# Altium PCB rf transmitter.PcbDoc
Units mm, origin at the board's own origin, x right, y up, seen from the top; angles counter-clockwise.
Board outline 67.44 x 37.08 mm, 2 copper layers (Top Layer, Bottom Layer); 15 components, 16 nets, 53 pads, 0 vias.
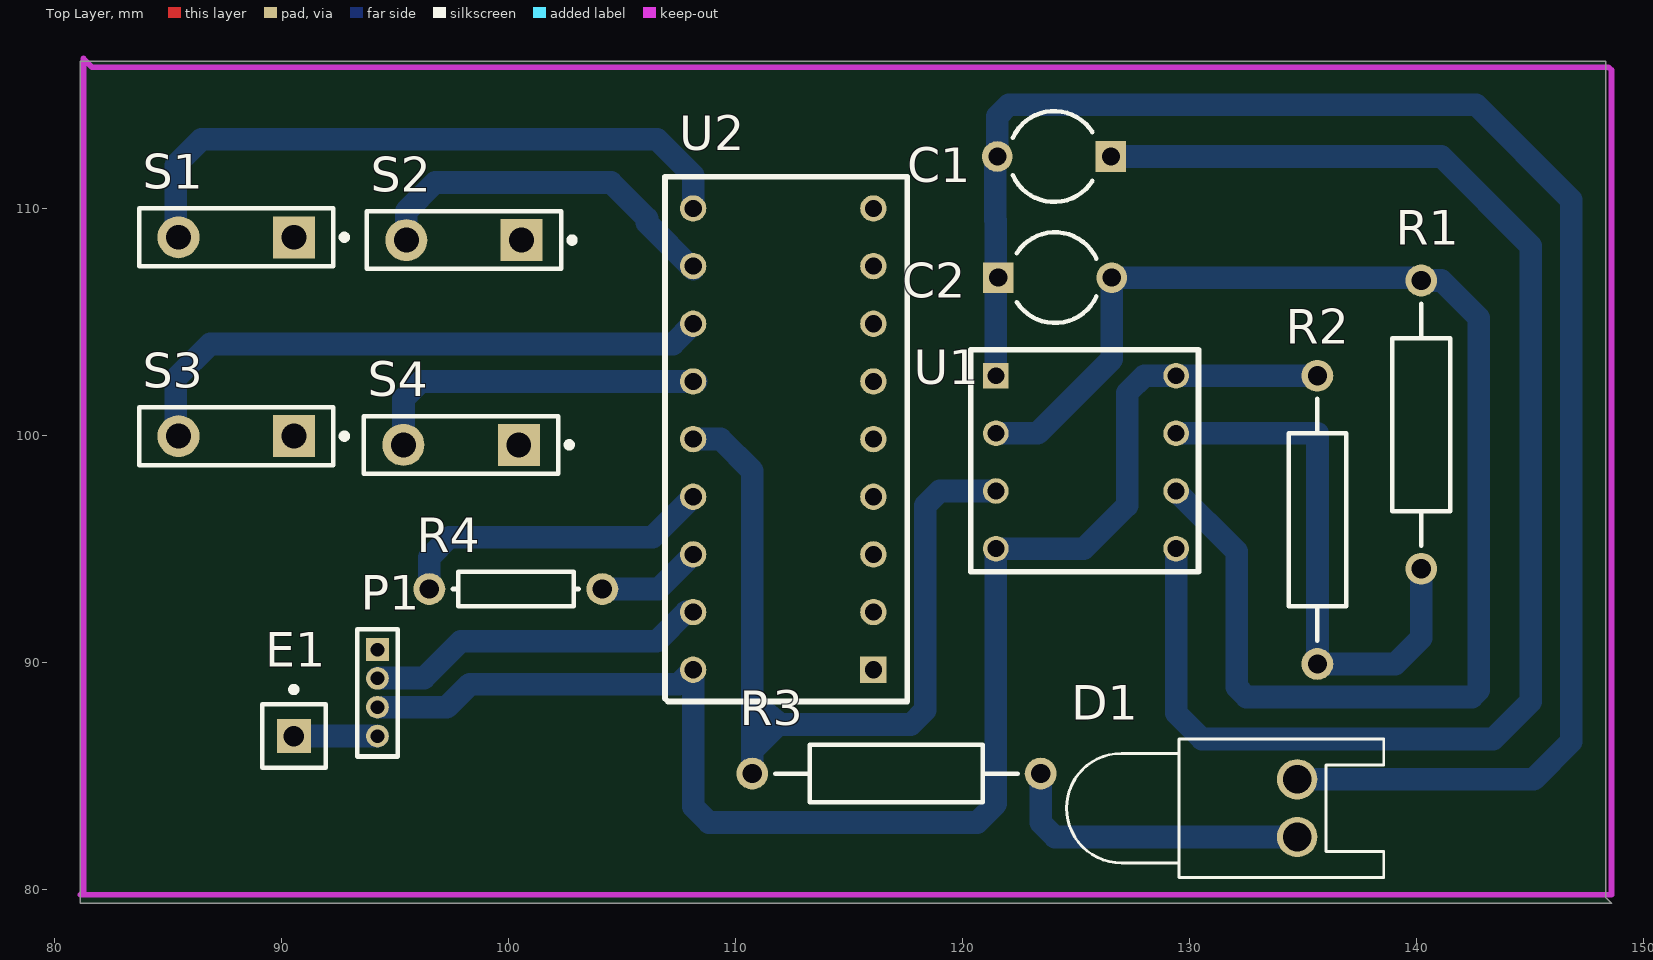
[diagram p0: Top Layer view]
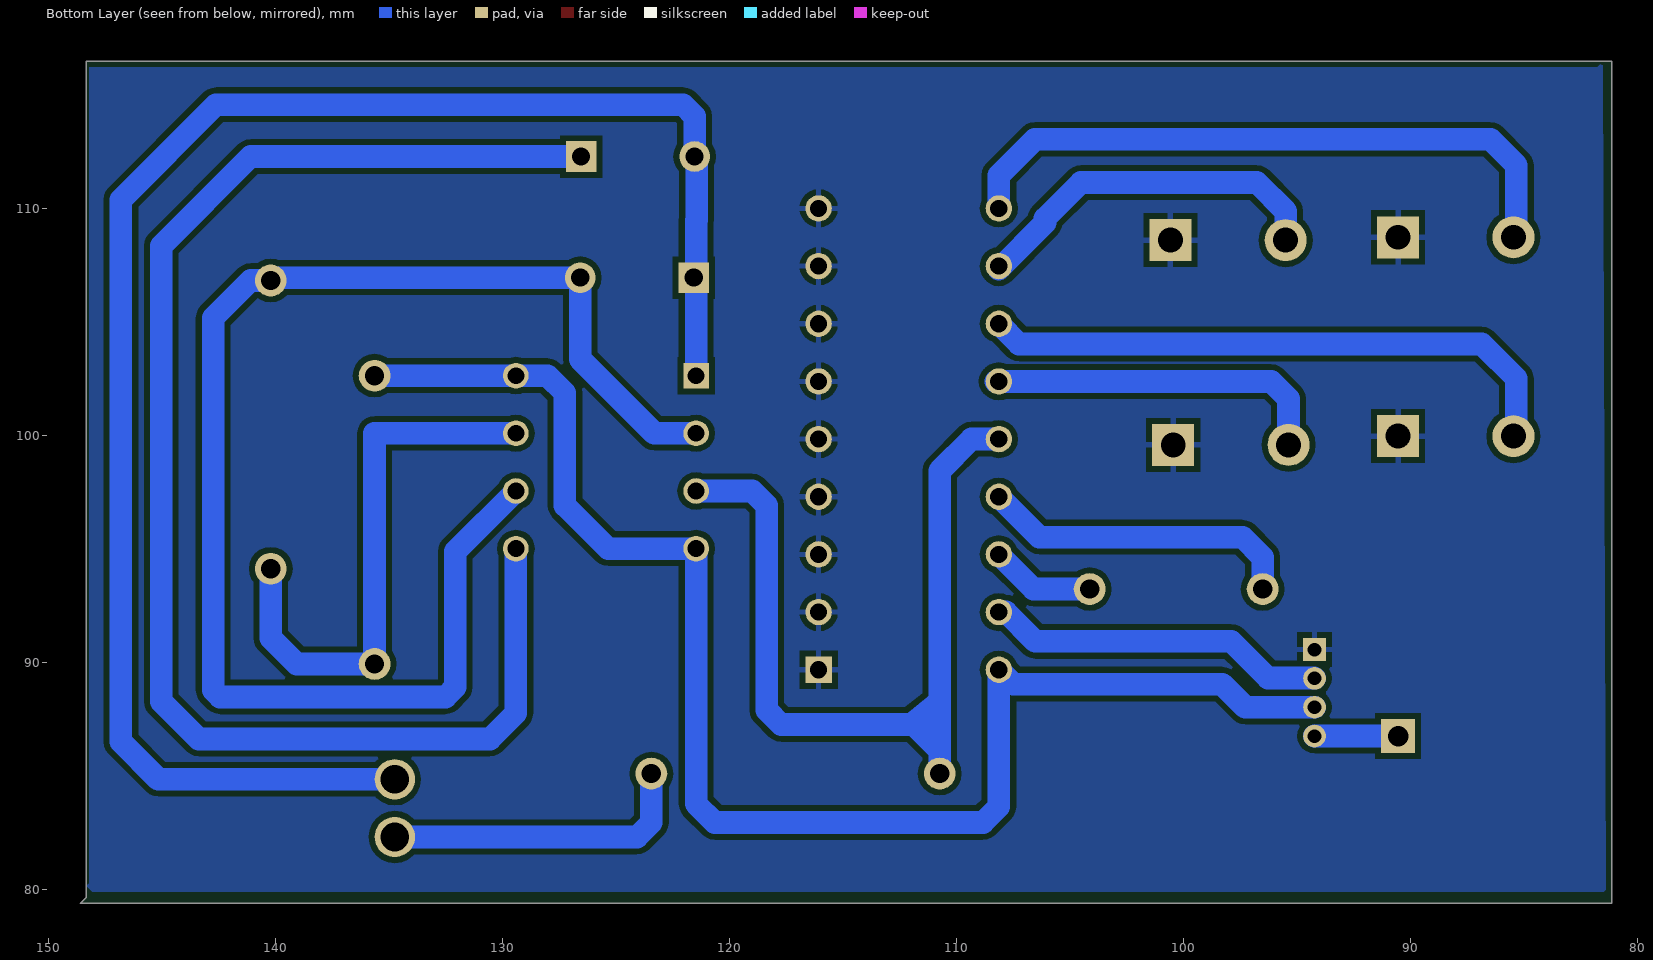
[diagram p1: Bottom Layer view, seen from below]

## Layer stack, top to bottom
Top Solder: solder mask 0.0102, Solder Resist, Dk 3.5
Top Layer: signal copper 0.0356
Dielectric 1: dielectric 0.32, FR-4, Dk 4.8
Bottom Layer: signal copper 0.0356
Bottom Solder: solder mask 0.0102, Solder Resist, Dk 3.5

## Board outline
82.042,116.459 148.336,116.459 148.336,79.629 148.59,79.375 81.153,79.375 81.153,116.459

## Design rules (kind name [scope] priority, off if disabled: settings)
Clearance [All] p1: gap=0.25 ignorepadtopadclearanceinfootprint=FALSE
PolygonConnect [All] p1: connectstyle=Relief reliefconductorwidth=0.254 reliefentries=4 polygonreliefangle="90 Angle" airgapwidth=0.254
RoutingVias [All] p1: holewidth=0.711 width=1.27 viastyle="Through Hole" minholewidth=0.711 minwidth=1.27 maxholewidth=0.711 maxwidth=1.27
SolderMaskExpansion [All] p1: expansion=0.102
Width [All] p1: maxlimit=2 minlimit=0.5 preferedwidth=1
30 further rules are at their usual default settings.

## Components (designator, comment, footprint, x,y, rotation, side; value= is the part's Value field where it differs from the comment)
C1 "Cap2" CAPR5-4X5 124.039,112.268 r180 top value=0.1uF
C2 "Cap2" CAPR5-4X5 124.079,106.934 r0 top value=4.7uF
D1 "LED0" LED-0 134.747,83.566 r270 top
E1 "Antenna" PIN1 90.551,86.741 r0 top
P1 "MHDR1X4" MHDR1X4 94.234,90.551 r270 top
R1 "Res Semi" AXIAL-0.5 140.208,100.457 r270 top value=100K
R2 "Res Semi" AXIAL-0.5 135.636,96.266 r90 top value=10K
R3 "Res Semi" AXIAL-0.5 117.094,85.09 r180 top value=1K
R4 "Res1" AXIAL-0.3 100.33,93.218 r180 top value=1K
S1 "SW-PB" SPST-2 88.011,108.712 r180 top
S2 "SW-PB" SPST-2 98.044,108.585 r180 top
S3 "SW-PB" SPST-2 88.011,99.949 r180 top
S4 "SW-PB" SPST-2 97.917,99.568 r180 top
U1 "LMC555" LMC555new 121.506,102.616 r0 top
U2 "HT12E" HT12E 116.045,89.662 r180 top

## Footprints (in the part's own frame and the unit in brackets; to place one, negate y for a bottom-side part, rotate by r counter-clockwise, add the part's x,y. Pads: shape width x height; smd on the part's side, far side on the other; paste and mask are expansions set on the pad)
AXIAL-0.3 [mm] "Axial Device, Thru-Hole; 2 Leads; 0.3 in Pin Spacing"
  round 1.4 hole 0.85: 1(-3.81,0) 2(3.81,0)
  silkscreen extent -2.77,-0.76 2.77,0.76
AXIAL-0.5 [mm] "Axial Device, Thru-Hole; 2 Leads; 0.5 in Pin Spacing"
  round 1.4 hole 0.85: 1(-6.35,0) 2(6.35,0)
  silkscreen extent -5.33,-1.27 5.33,1.27
CAPR5-4X5 [mm] "Capacitor; 2 Leads"
  rect 1.35x1.35 hole 0.8: 1(-2.5,0)
  round 1.35 hole 0.8: 2(2.5,0)
  silkscreen extent -1.69,-2 1.82,2
HT12E [mm] "HT12E"
  rect 1.16x1.16 hole 0.76: 1(-0.033,0)
  round 1.16 hole 0.76: 2(-0.033,-2.54) 3(-0.033,-5.08) 4(-0.033,-7.62) 5(-0.033,-10.16) 6(-0.033,-12.7) 7(-0.033,-15.24) 8(-0.033,-17.78) 9(-0.033,-20.32) 10(7.907,-20.32) 11(7.907,-17.78) 12(7.907,-15.24) 13(7.907,-12.7) 14(7.907,-10.16) 15(7.907,-7.62) 16(7.907,-5.08) 17(7.907,-2.54) 18(7.907,0)
  silkscreen extent -1.52,-21.72 9.14,1.4
LED-0 [mil] "LED; 2 Leads"
  round 70 hole 50: 1(50,0) 2(-50,0)
  silkscreen extent -120,-400 120,150
LMC555new [mm]
  rect 1.13x1.13 hole 0.74: 1(-0.033,0)
  round 1.13 hole 0.74: 2(-0.033,-2.54) 3(-0.033,-5.08) 4(-0.033,-7.62) 5(7.907,-7.62) 6(7.907,-5.08) 7(7.907,-2.54) 8(7.907,0)
  silkscreen extent -1.14,-8.64 8.89,1.14
MHDR1X4 [mm] "Connector; Header; 4 Position"
  rect 1x1 hole 0.6: 1(0,0)
  round 1 hole 0.6: 2(1.27,0) 3(2.54,0) 4(3.81,0)
  silkscreen extent -0.9,-0.9 4.71,0.9
PIN1 [mm] "Generic Antenna; 1 Lead"
  rect 1.5x1.5 hole 0.9: 1(0,0)
  silkscreen extent -1.4,-1.4 1.4,2.17
SPST-2 [mm] "Switch; 2 Leads"
  rect 1.85x1.85 hole 1.1: 1(-2.54,0)
  round 1.85 hole 1.1: 2(2.54,0)
  silkscreen extent -4.89,-1.27 4.28,1.27

## Part data
C1 C2: "Capacitor", PackageDescription="Capacitor; 2 Leads", PackageReference=CAPR5-4X5, Published=23-Sep-2002, Publisher="Altium Limited"
D1: "Typical INFRARED GaAs LED", LatestRevisionDate=08-Jul-2005, LatestRevisionNote="Mech Layer 1 removed.", PackageDescription="LED; 2 Leads", PackageReference=LED-0, Published=8-Jun-2000, Publisher="Altium Limited"
E1: "Generic Antenna", LatestRevisionDate=17-Jul-2002, LatestRevisionNote="Re-released for DXP Platform.", PackageReference=PIN1, Published=24-Mar-1999, Publisher="Altium Limited"
P1: "Header, 4-Pin", LatestRevisionDate=17-Jul-2002, LatestRevisionNote="Re-released for DXP Platform.", Publisher="Altium Limited"
R1 R2 R3: "Semiconductor Resistor", LatestRevisionDate=17-Jul-2002, LatestRevisionNote="Re-released for DXP Platform.", PackageDescription="Axial Device, Thru-Hole; 2 Leads; 0.5 in Pin Spacing", PackageReference=AXIAL-0.5, Published=8-Jun-2000, Publisher="Altium Limited"
R4: "Resistor", LatestRevisionDate=17-Jul-2002, LatestRevisionNote="Re-released for DXP Platform.", PackageDescription="Axial Device, Thru-Hole; 2 Leads; 0.3 in Pin Spacing", PackageReference=AXIAL-0.3, Published=8-Jun-2000, Publisher="Altium Limited"
S1 S2 S3 S4: "Switch", LatestRevisionDate=17-Jul-2002, LatestRevisionNote="Re-released for DXP Platform.", PackageDescription="Switch; 2 Leads", PackageReference=SPST-2, Published=24-Mar-1999, Publisher="Altium Limited"
U2: library part Encoder

## Nets (pads, with @x,y where several pads share a name; then routed paths per layer and width w, separated by ;. In a path a pad name is that pad's centre, name@x,y a point inside that pad or via, vN(x,y) a via of type N, cw(c..) or ccw(c..) an arc to the next point about the centre after c; other vN are vias at no path point)
GND: P1.1 S1.1 S2.1 S3.1 S4.1 U2.1 U2.2 U2.3 U2.4 U2.5 U2.6 U2.7 U2.8 U2.9
NetC1_1: C1.1 U1.5 | length 64.3
  Bottom Layer w1: C1.1@126.452,112.268 C1.1 141.097,112.268 145.034,108.331 145.034,88.265 143.383,86.614 130.556,86.614 129.413,87.757 U1.5
NetC1_2: C1.2 C2.1 D1.2 U1.1 | length 75.3
  Bottom Layer w1: C1.2@121.452,112.268 121.452,109.474 121.473,109.453 U1.1 ; C1.2 121.539,114.046 122.047,114.554 142.621,114.554 146.812,110.363 146.812,86.487 145.161,84.836 D1.2
NetC2_2: C2.2 R1.1 U1.2 U1.6 | length 64.1
  Bottom Layer w1: U1.2 123.317,100.076 126.579,103.338 C2.2 140.081,106.934 R1.1 141.097,106.807 142.748,105.156 142.748,88.773 142.441,88.466 132.514,88.466 132.08,88.9 132.08,94.869 U1.6
NetD1_1: D1.1 R3.1 | length 13.7
  Bottom Layer w1: R3.1 123.444,82.931 124.079,82.296 D1.1
NetE1_1: E1.1 P1.4 | length 3.7
  Bottom Layer w1: E1.1 P1.4
NetP1_2: P1.2 U2.17 | length 15.1
  Bottom Layer w1: P1.2 94.254,89.301 96.286,89.301 97.897,90.912 106.533,90.912 107.823,92.202 U2.17
NetP1_3: P1.3 R2.2 U1.4 U1.8 U2.18 | length 66
  Bottom Layer w1: P1.3 97.282,88.011 98.298,89.027 107.503,89.027 U2.18 108.138,83.632 108.839,82.931 120.65,82.931 121.473,83.754 U1.4 125.349,94.996 127.254,96.901 127.254,101.854 128.016,102.616 U1.8 R2.2
NetR1_2: R1.2 R2.1 U1.7 | length 24.6
  Bottom Layer w1: U1.7 135.636,100.076 R2.1 ; R2.1@135.636,89.789 R2.1 ; R1.2 140.208,91.059 139.065,89.916 R2.1
NetR3_2: R3.2 U1.3 U2.14 | length 39.3
  Bottom Layer w1: U2.14 109.347,99.822 110.744,98.425 110.744,88.265 ; R3.2 110.744,86.106 ; 111.506,87.249 111.887,87.249 ; U1.3 118.999,97.536 118.364,96.901 118.364,87.884 117.729,87.249 111.887,87.249 ; 110.744,86.106 110.744,88.265 ; 110.744,86.106 111.887,87.249 ; 110.744,88.265 111.943,87.305 111.887,87.249
NetR4_1: R4.1 U2.16 | length 4.8
  Bottom Layer w1: R4.1@104.013,93.091 R4.1 106.614,93.218 U2.16
NetR4_2: R4.2 U2.15 | length 14.1
  Bottom Layer w1: R4.2 96.52,94.615 97.409,95.504 106.36,95.504 U2.15
NetS1_2: S1.2 U2.10 | length 28.6
  Bottom Layer w1: S1.2@85.344,108.712 85.344,111.887 86.487,113.03 106.553,113.03 108.138,111.445 U2.10
NetS2_2: S2.2 U2.11 | length 16.1
  Bottom Layer w1: S2.2 95.504,109.855 96.774,111.125 104.521,111.125 106.106,109.54 106.106,109.347 U2.11@108.138,107.315
NetS3_2: S3.2 U2.12 | length 26.4
  Bottom Layer w1: S3.2 85.344,100.076 85.344,102.489 86.868,104.013 107.249,104.013 U2.12
NetS4_2: S4.2 U2.13 | length 15.2
  Bottom Layer w1: S4.2 95.377,101.6 96.139,102.362 U2.13 U2.13@108.265,102.362

## Polygon pours and split planes (outlines as drawn)
GND on Bottom Layer "Bottom Layer-No Net" (solid, pour order 2): 81.534,116.459 81.788,116.205 148.209,116.205 148.209,80.264 148.336,80.137 148.082,79.883 81.407,79.883

## Keep-outs
Top Layer:
  lines w0.254: 81.153,79.756 148.59,79.756 148.59,116.078 148.463,116.205 81.661,116.205 81.28,116.586 81.28,79.883 81.153,79.756